# Altium PCB Payload_Switch_Board.PcbDoc
Units mm, origin at the board's own origin, x right, y up, seen from the top; angles counter-clockwise.
Board outline 63.88 x 18.29 mm, 2 copper layers (Top Layer, Bottom Layer); 6 components, 7 nets, 23 pads, 0 vias.
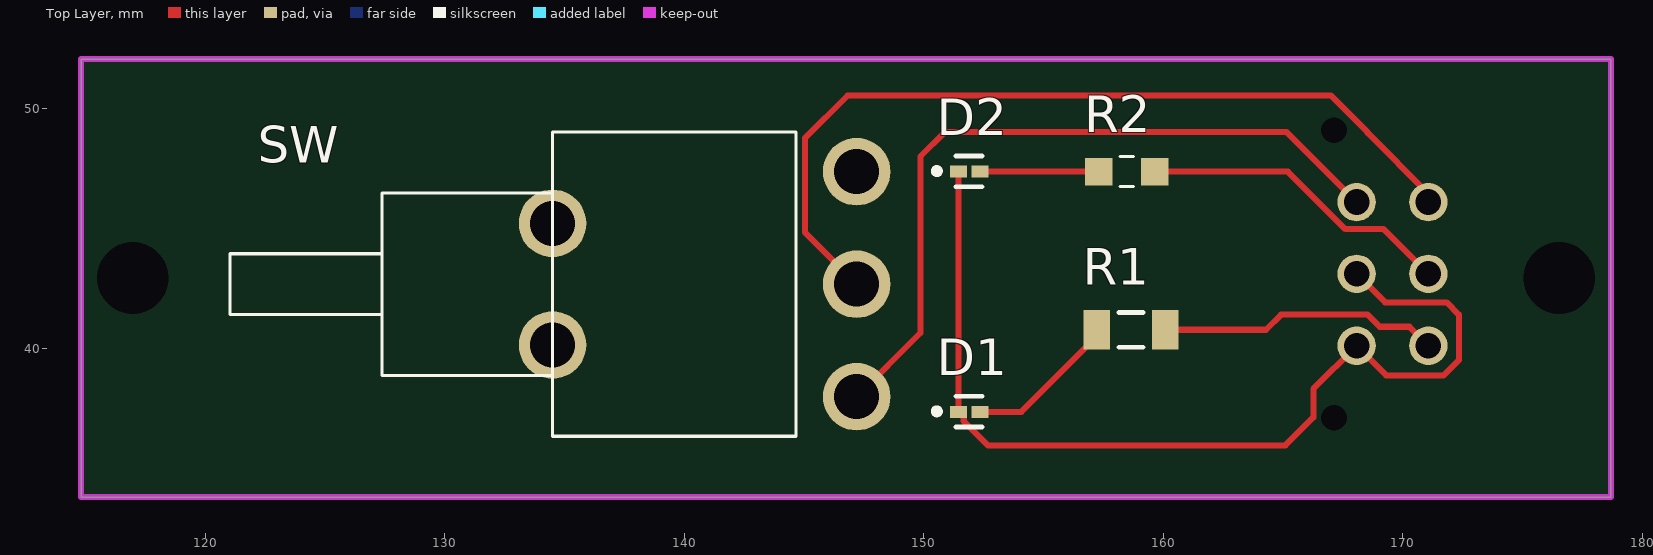
[diagram p0: Top Layer view]
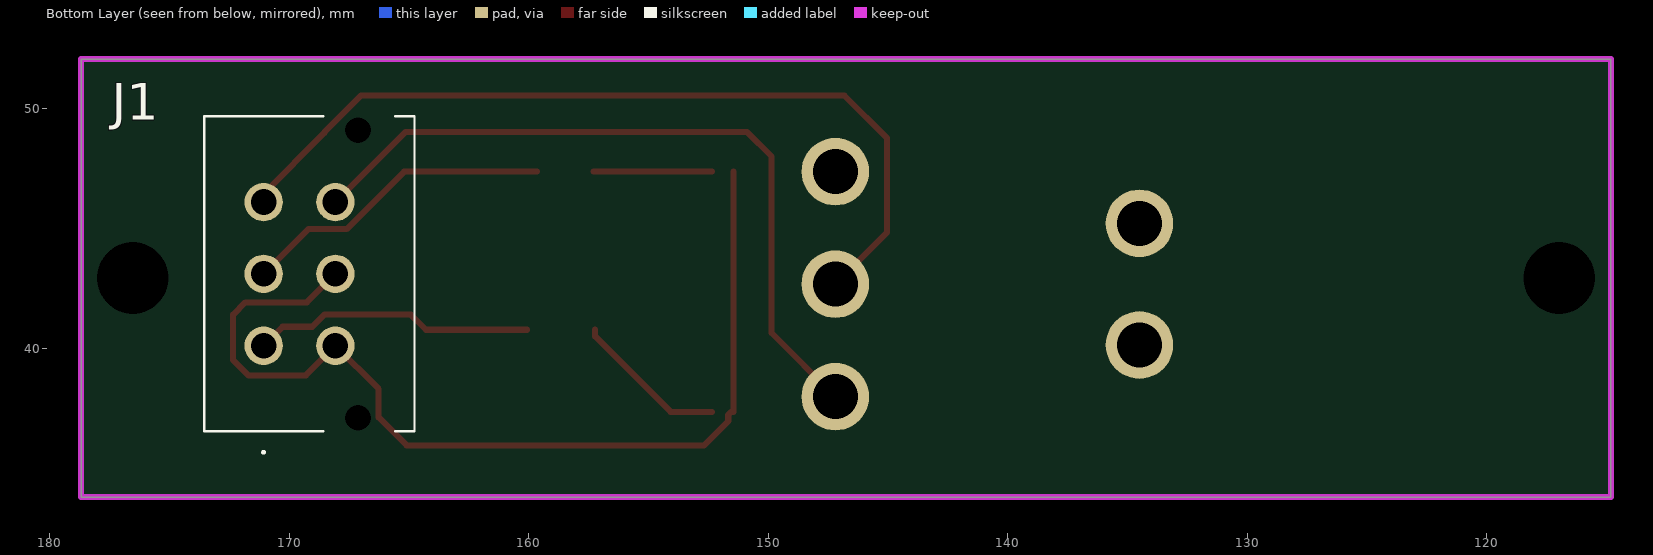
[diagram p1: Bottom Layer view, seen from below]

## Layer stack, top to bottom
Top Solder: solder mask 0.0102, Solder Resist, Dk 3.5
Top Layer: signal copper 0.0356
Dielectric 1: dielectric 0.32, FR-4, Dk 4.8
Bottom Layer: signal copper 0.0356
Bottom Solder: solder mask 0.0102, Solder Resist, Dk 3.5

## Board outline
114.808,33.782 178.689,33.782 178.689,52.07 114.808,52.07

## Design rules (kind name [scope] priority, off if disabled: settings)
Clearance [All] p1: gap=0.2 ignorepadtopadclearanceinfootprint=FALSE
HoleSize [All] p1: absolutevalues=TRUE maxlimit=3 minlimit=0.025 maxpercent=80.000 minpercent=20.000
MinimumSolderMaskSliver [All] p1: minsoldermaskwidth=0.2
PolygonConnect [All] p1: connectstyle=Relief reliefconductorwidth=0.254 reliefentries=4 polygonreliefangle="90 Angle" airgapwidth=0.254
RoutingVias [All] p1: holewidth=0.711 width=1.27 viastyle="Through Hole" minholewidth=0.711 minwidth=1.27 maxholewidth=0.711 maxwidth=1.27
SolderMaskExpansion [All] p1: expansion=0.102 istentingtop=FALSE
Width [All] p1: maxlimit=0.254 minlimit=0.254 preferedwidth=0.254
28 further rules are at their usual default settings.

## Components (designator, comment, footprint, x,y, rotation, side; value= is the part's Value field where it differs from the comment)
D1 "LED7.4" FP-APHHS1005CGCK-MFG 151.892,37.338 r0 top
D2 "LED3.3" FP-APHHS1005CGCK-MFG 151.892,47.371 r0 top
J1 "0430450614" 0430450614 171.069,40.101 r270 bottom
R1 "261R" RESC3216X70X50NL05T20 158.651,40.767 r180 top
R2 "59R" RES_ERJP06F59R0V 158.472,47.371 r0 top
SW "100SP1T2B4M6QE" TOGGLE_RA 134.493,42.672 r270 top

## Footprints (in the part's own frame and the unit in brackets; to place one, negate y for a bottom-side part, rotate by r counter-clockwise, add the part's x,y. Pads: shape width x height; smd on the part's side, far side on the other; paste and mask are expansions set on the pad)
0430450614 [mm]
  round 1.605 hole 1.07: 1(0,0) 2(-3,0) 3(-6,0) 4(0,3) 5(-3,3) 6(-6,3)
  round 0.535 hole 1.07 unplated: MH1(3,3.94) MH2(-9,3.94)
  silkscreen extent -9.57,-2.47 4.5,6.3, body extent -9.57,-2.47 3.57,6.3, height 10.26
FP-APHHS1005CGCK-MFG [mm]
  rect 0.7x0.5 smd paste+0 mask+0: 1(-0.45,0) 2(0.45,0)
  silkscreen extent -1.47,-0.63 0.55,0.65, body extent -0.9,-0.4 0.9,0.4, height 0.25
RES_ERJP06F59R0V [mm]
  rect 1.15x1.15 smd: 1(-1.175,0) 2(1.175,0)
  silkscreen extent -0.28,-0.63 0.28,0.63
RESC3216X70X50NL05T20 [mm] "Chip Resistor, 2-Leads, Body 3.20x1.60mm, IPC Medium Density"
  rect 1.1x1.65 smd: 1(-1.425,0) 2(1.425,0)
  silkscreen extent -0.5,-0.72 0.5,0.72, body extent -1.63,-0.82 1.62,0.82, height 0.7
TOGGLE_RA [mil]
  round 111 hole 74: 1(185,500) 2(0,500) 3(-185,500) P$4(-100,0) P$5(100,0)
  silkscreen extent -250,-530 250,400

## Part data
D1 D2: library part CMP-44529-000044-1, "LED GREEN CLEAR CHIP SMD", Case Code (Imperial)=0402, Case Code (Metric)=1005, Color=Green, Forward Current=20mA, Forward Voltage=2.1V, Lens Color=Clear, Max Operating Temperature=85°C, Min Operating Temperature=-40°C, Package Quantity=2000, Case/Package=0402, Dominant Wavelength=570nm, Height=0.6mm, Illumination Color=Green, Lead Free="Lead Free", Length=1mm, Lens Style=Clear, Luminous Intensity=50mcd, Mount="Surface Mount", Number of LEDs=1, Number of Pins=2, Packaging="Tape and Reel", Test Current=20mA, Viewing Angle=120°, Wavelength=570nm, Width=0.5mm
J1: "Connector", Manufacturer_Name=Molex, Mouser Part Number=N/A, Arrow Part Number=0430450614, Arrow Price/Stock=https://www.arrow.com/en/products/0430450614/molex?region=nac, Datasheet Link=https://www.molex.com/pdm_docs/sd/430450614_sd.pdf, Height=10.16mm, Manufacturer_Part_Number=0430450614, Mouser Price/Stock=https://www.mouser.co.uk/ProductDetail/Molex/0430450614?qs=PBcRNPEHKsqC6mUhVPlcHQ%3D%3D
R1: library part CMP-2003-00255-1, Manufacturer=Panasonic, Part Number=ERJ-8ENF2610V
R2: library part ERJP06F59R0V, Package=None, Availability=Unavailable, MP=ERJP06F59R0V, Price=None
SW: "Toggle Switch SPDT Through Hole, Right Angle", Package=None, Availability=Unavailable, MF=E-Switch, MP=100SP1T2B4M6QE, Price=None, SnapEDA_Link=https://www.snapeda.com/parts/100SP1T2B4M6QE/E-Switch/view-part/584067/?ref=snap

## Free pads (board coordinates)
  round 1.52 hole 2.997 mask+0.076: 1(116.967,42.926)
  round 1.524 hole 2.997: 2(176.53,42.926)

## Nets (pads, with @x,y where several pads share a name; then routed paths per layer and width w, separated by ;. In a path a pad name is that pad's centre, name@x,y a point inside that pad or via, vN(x,y) a via of type N, cw(c..) or ccw(c..) an arc to the next point about the centre after c; other vN are vias at no path point)
NetD1_1: D1.1 D2.1 J1.4 J1.5 | length 41.7
  Top Layer w0.254: D2.1 D1.1 151.542,37.338 151.665,37.215 151.665,36.953 152.677,35.941 165.1,35.941 166.267,37.108 166.267,38.299 J1.4 169.308,38.862 171.704,38.862 172.339,39.497 172.339,41.402 171.831,41.91 169.26,41.91 J1.5
NetD1_2: D1.2 R1.2 | length 6.5
  Top Layer w0.254: D1.2 154.072,37.338 157.226,40.492 R1.2
NetD2_2: D2.2 R2.1 | length 5
  Top Layer w0.254: D2.2 R2.1
NetJ1_1: J1.1 R1.1 | length 11.8
  Top Layer w0.254: R1.1 164.286,40.767 164.921,41.402 168.529,41.402 169.037,40.894 170.276,40.894 J1.1
NetJ1_2: J1.2 R2.2 | length 13.2
  Top Layer w0.254: R2.2 165.202,47.371 167.601,44.972 169.198,44.972 J1.2
NetJ1_3: J1.3 SW.2 | length 35.8
  Top Layer w0.254: SW.2 145.034,44.831 145.034,48.768 146.812,50.546 167.005,50.546 168.529,49.022 168.529,48.986 171.069,46.446 J1.3
NetJ1_6: J1.6 SW.1 | length 31
  Top Layer w0.254: SW.1 149.86,40.64 149.86,48.006 150.876,49.022 165.148,49.022 J1.6
pads on no net: J1.MH1 J1.MH2 SW.3 SW.P$4 SW.P$5

## Keep-outs
Keep-Out Layer:
  the board outline again, w0.254